# Altium PCB LiPoBattery_charger_PCB.PcbDoc
Units mil, origin at the board's own origin, x right, y up, seen from the top; angles counter-clockwise.
Board outline 2200 x 1700 mil, 2 copper layers (Top Layer, Bottom Layer); 18 components, 10 nets, 53 pads, 5 vias.
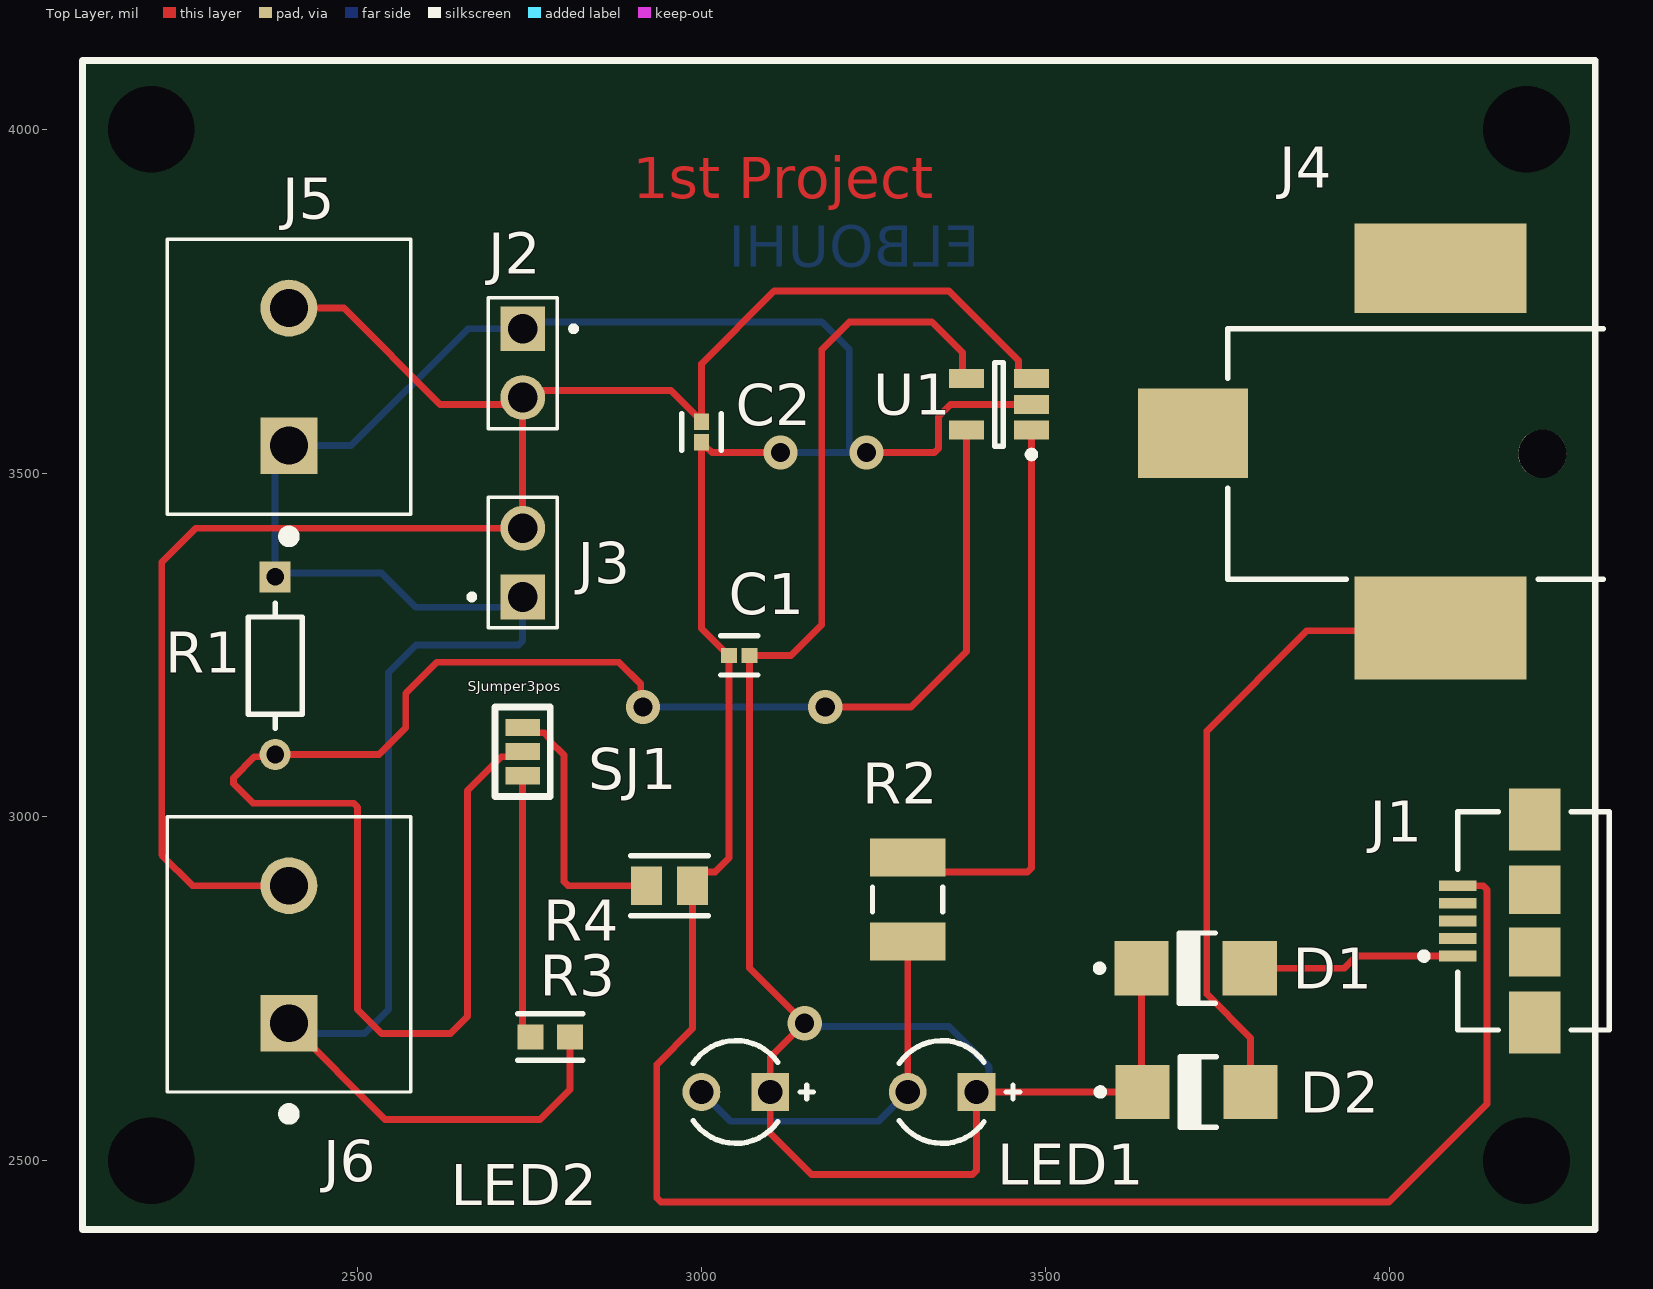
[diagram p0: Top Layer view]
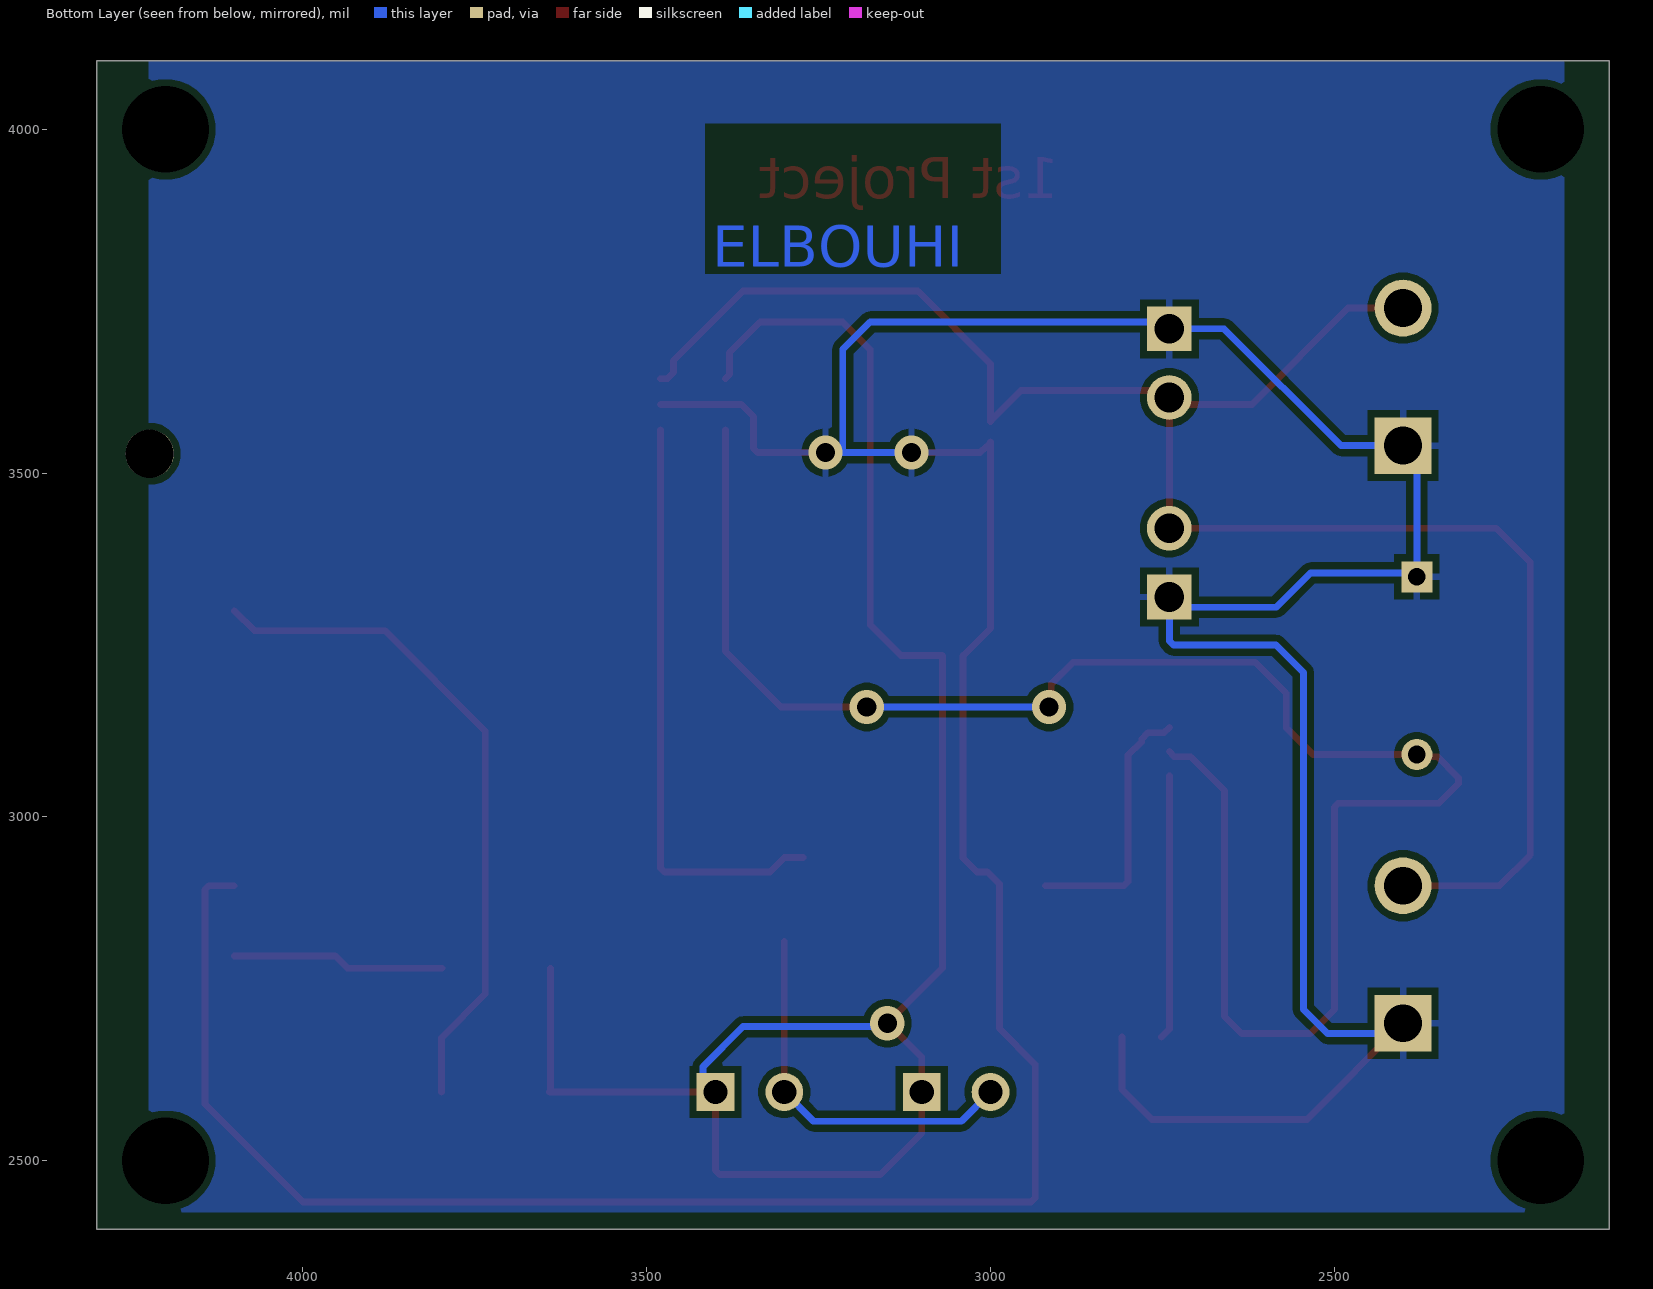
[diagram p1: Bottom Layer view, seen from below]

## Layer stack, top to bottom
Top Solder: solder mask 0.4, Solder Resist, Dk 3.5
Top Layer: signal copper 1.4
Dielectric 1: dielectric 12.6, FR-4, Dk 4.8
Bottom Layer: signal copper 1.4
Bottom Solder: solder mask 0.4, Solder Resist, Dk 3.5

## Board outline
2100,2400 4300,2400 4300,4100 2100,4100

## Design rules (kind name [scope] priority, off if disabled: settings)
Clearance [All] p1: gap=10 ignorepadtopadclearanceinfootprint=FALSE except(0: Arc-Hole Track-Hole SMDPad-Hole THPad-Hole Via-Hole Fill-Hole Poly-Hole Region-Hole Text-Hole)
PolygonConnect [All] p1: connectstyle=Relief reliefconductorwidth=10 reliefentries=4 polygonreliefangle="90 Angle" airgapwidth=10
RoutingVias [All] p1: holewidth=28 width=50 viastyle="Through Hole" minholewidth=28 minwidth=50 maxholewidth=28 maxwidth=50
SolderMaskExpansion [All] p1: expansion=4 istentingtop=FALSE
Width [All] p1: maxlimit=10 minlimit=10 preferedwidth=10
30 further rules are at their usual default settings.

## Components (designator, comment, footprint, x,y, rotation, side; value= is the part's Value field where it differs from the comment)
C1 "4.7uF" FP-GRM155-0_15-IPC_C 3055,3235 r180 top
C2 "4.7uF" FP-GRM155-0_15-IPC_C 3000,3560 r270 top
D1 "DIODE" ONSC-SMA-2-403D-02_V 3718.74,2780 r0 top
D2 "DIODE" ONSC-SMA-2-403D-02_V 3720,2600 r0 top
J1 "MICRO-USB PORT" FCI-10104110-0001LF_V 4156.1,2848.82 r90 top locked
J2 "67997-402HLF" AMPHENOL_67997-402HLF 2740,3660 r180 top
J3 "67997-402HLF" AMPHENOL_67997-402HLF 2740,3370 r0 top
J4 "POWER SUPPLY" FP-RASM722PTR13X-MFG 4055.71,3528.15 r90 top locked
J5 "282841-2" TE_282841-2 2400,3640 r90 top locked
J6 "282841-2" TE_282841-2 2400,2800 r90 top locked
LED1 "RED" INDPR60-254-520X380X650 3350,2600 r180 top
LED2 "RED" INDPR60-254-520X380X650 3050,2600 r180 top
R1 "PROG" FP-CF18-MFG 2380,3220 r270 top value=10kΩ
R2 "330" RESC3225X60X45ML20T20 3300,2880 r90 top
R3 "2K" FP-CR0603-IPC_B 2780,2680 r180 top
R4 "10K" FP-TFCR0805-IPC_B 2953.51,2900 r180 top
SJ1 "SJumper3pos" PCBComponent_1 2740,3095 r90 top
U1 "Charge management controller" SOT-23-OT5_M 3432.76,3600 r180 top

## Footprints (in the part's own frame and the unit in brackets; to place one, negate y for a bottom-side part, rotate by r counter-clockwise, add the part's x,y. Pads: shape width x height; smd on the part's side, far side on the other; paste and mask are expansions set on the pad)
AMPHENOL_67997-402HLF [mm]
  rect 1.65x1.65 / inner round 1.65 / far side rect 1.65x1.65 hole 1.1: 1(0,-1.27)
  round 1.65 hole 1.1: 2(0,1.27)
  silkscreen extent -1.98,-2.41 1.27,2.41
FCI-10104110-0001LF_V [mm] "SMD, 5-Leads, Body 8.06x5.6mm, Pitch 0.65mm"
  rect 0.4x1.4 smd: 1(-1.3,1.425) 2(-0.65,1.425) 3(0,1.425) 4(0.65,1.425) 5(1.3,1.425)
  rect 1.8x1.9 smd: 6(-1.15,-1.425) 7(1.15,-1.425)
  rect 2.3x1.9 smd: 8(-3.75,-1.425) 9(3.75,-1.425)
  silkscreen extent -4.03,-4.17 4.03,2.8, body extent -4.03,-4.17 4.03,1.43, height 2.95
FP-CF18-MFG [mm]
  rect 1.15x1.15 hole 0.65 paste-1000 mask+0: 1(-3.28,0)
  round 1.15 hole 0.65 paste-1000 mask+0: 2(3.28,0)
  silkscreen extent -2.3,-1 2.31,1, body extent -3.96,-1.1 3.96,1.1, height 0.25
FP-CR0603-IPC_B [mil]
  rect 37.72x35.91 smd paste+0 mask+0: 1(-28.62,0) 2(28.62,0)
  silkscreen extent -47,-34 47,34, body extent -57,-28 57,28, height 10
FP-GRM155-0_15-IPC_C [mil]
  rect 23.78x21.98 smd paste+0 mask+0: 1(-14.85,0) 2(14.84,0)
  silkscreen extent -27,-29 27,29, body extent -31,-17 31,17, height 10
FP-RASM722PTR13X-MFG [mm]
  rect 3.3x4.06 smd paste+0 mask+0: 1(0.76,8.65)
  rect 3.81x6.35 smd paste+0 mask+0: 2(-6.43,-0.49)
  rect 3.3x6.35 smd paste+0 mask+0: 3(6.86,-0.49)
  round 1.78 hole 1.78 unplated paste-1000 mask+0: ""(0,-4.25)
  silkscreen extent -4.63,-6.5 4.63,7.38, body extent -8.43,-7.48 8.61,10.78, height 0.25
FP-TFCR0805-IPC_B [mil]
  rect 45.5x55.44 smd paste+0 mask+0: 1(-33.51,0) 2(33.51,0)
  silkscreen extent -56,-43 56,43, body extent -66,-38 66,38, height 10
INDPR60-254-520X380X650 [mm] "THD, 2-Leads, Dia 3.8mm, Pitch 2.54mm"
  rect 1.4x1.4 hole 0.9: 1(-1.27,0)
  round 1.4 hole 0.9: 2(1.27,0)
  silkscreen extent -2.87,-1.9 1.58,1.9, body extent -1.9,-1.9 1.9,1.9, height 6.5
ONSC-SMA-2-403D-02_V [mm] "Molded, 2-Leads, Body 4.57x2.92mm"
  rect 2x2 smd: 1(-2,0) 2(2,0)
  silkscreen extent -3.67,-1.3 0.74,1.3, body extent -2.16,-1.3 2.16,1.3, height 2.2
PCBComponent_1 [mil]
  rect 25x50 smd: 1(-35,0) 2(0,0) 3(35,0)
  silkscreen extent -65,-40 65,40
RESC3225X60X45ML20T20 [mm] "Chip Resistor, 2-Leads, Body 3.20x2.50mm, IPC Low Density"
  rect 1.4x2.8 smd: 1(-1.55,0) 2(1.55,0)
  silkscreen extent -0.45,-1.3 0.45,1.3, body extent -1.7,-1.35 1.7,1.35, height 0.6
SOT-23-OT5_M [mm] "SOT23, 5-Leads, Body 2.9x1.7mm, Pitch 0.95mm, Lead Span 2.8mm, IPC Low Density"
  rect 1.3x0.7 smd: 1(-1.2,0.95) 2(-1.2,0) 3(-1.2,-0.95) 4(1.2,-0.95) 5(1.2,0.95)
  silkscreen extent -1.33,-1.55 0.15,1.97, body extent -0.9,-1.55 0.9,1.55, height 1.45
TE_282841-2 [mm]
  rect 2.1x2.1 / inner round 2.1 / far side rect 2.1x2.1 hole 1.4: 1(-2.54,0)
  round 2.1 hole 1.4: 2(2.54,0)
  silkscreen extent -6.09,-4.5 5.08,4.5, body extent -5.08,0 5.58,9, height 15.2

## Part data
C1 C2: library part CMP-06035-015349-1, "Chip Multilayer Ceramic Capacitors for General Purpose, 0402, 4.7uF, X6S, 22%, 20%, 6.3V", Dielectric=X6S, Tolerance=20%, Voltage Rating (DC)=6.3V, Capacitance=4.7uF, Length=1mm, Thickness=500um, Width=500um
D1 D2: library part CMP-1055-00320-1, "Schottky Power Rectifier, 2-Pin SMA, Pb-Free, Tape and Reel", Manufacturer="On Semiconductor", PartNumber=MBRA140T3G, ComponentLink1Description="Manufacturer URL", ComponentLink1URL=http://www.onsemi.com/, ComponentLink2Description=Datasheet, ComponentLink2URL=http://www.onsemi.cn/pub_link/Collateral/MBRA140T3-D.PDF, ComponentLink3Description="Package Specification", ComponentLink3URL=http://www.onsemi.com/pub_link/Collateral/403D-02.PDF, Configuration=Single, DatasheetVersion="Rev. 10", IFSM Max (A)=30, Mounting Technology="Surface Mount", PackageDescription="2-Pin Small Molded Package, J-Bend Lead, Body 2.605 x 4.315 mm", PackageReference=SMA-2-403D-02, PackageVersion="Rev. G, 07/2012", Packing="Tape and Reel", RoHS=TRUE
J1: library part CMP-2000-05823-1, "Micro USB, Receptacle, -55 to 85 degC, 5-Pin SMD, RoHS, Tape and Reel", Manufacturer="FCI Electronics", Package Description="5-Pin Surface Mount Device, Body 8.06 x 5.6 mm, Pitch 0.65 mm", Package Reference=10104110-0001LF, Connector Mounting=PCB, Connector Type=USBMicroB, Contact Plating=Gold, Contact Termination=SurfaceMountRightAngle, Datasheet URL=http://portal.fciconnect.com/Comergent//fci/drawing/10104110.pdf, Datasheet Version="Rev. C, 03/2011", Gender=Receptacle, Manufacturer URL=http://portal.fciconnect.com/, Mounting Technology=SurfaceMount, No. of Contacts=5
J2 J3: Package=None, Availability=Unavailable, MF="{'manufacturer': u'Amphenol ICC (FCI)'}", MP=67997-402HLF, Price=None
J4: library part CMP-47995-000002-1, "CONN PWR JACK 2.1X5.5MM SOLDER", Case/Package=SMD/SMT, Color=Black, Current Rating=5A, Package Quantity=120, Connector Type=Jack, Contact Material="Copper Alloy", Contact Plating=Tin, Gender=Male, Housing Color=Black, Housing Material=Thermoplastic, Mount="Surface Mount", Shielding=Unshielded, Termination=Solder
J5 J6: "Conn Terminal Block 2 POS 5.08mm Solder ST Thru-Hole 17.5A/Contact", Package=None, Availability="In Stock", Check_prices=https://www.snapeda.com/parts/282841-2/TE+Connectivity+AMP+Connectors/view-part/?ref=eda, EU_RoHS_Compliance="Compliant with Exemptions", MF="TE Connectivity", MP=282841-2, Price=None, Purchase-URL=https://pricing.snapeda.com/search/part/282841-2/?ref=eda, SnapEDA_Link=https://www.snapeda.com/parts/282841-2/TE+Connectivity+AMP+Connectors/view-part/?ref=snap
LED1 LED2: library part CMP-1674-00005-1, "Radial LED, 12.6 mcd, 20 mA, 2 V, -55 to 100 degC, 2-Pin THD, RoHS, Bulk", Case\Package=Radial, Current Rating="3.6 A", Max Operating Temperature="130 degC", Min Operating Temperature="-40 degC", Package Quantity=55, Resistance="0.045 Ohm", Tolerance=20%, ComponentLink1Description="Manufacturer URL", ComponentLink1URL=http://www.us.liteon.com/, ComponentLink2Description=Datasheet, ComponentLink2URL=https://datasheet.ciiva.com/15117/getdatasheetpartid-187746-15117985.pdf, DatasheetVersion=Dec-03, Height="1.1 inch", Lead Pitch="11.44 mm", Length="0.97 inch", Mount="Through Hole", PackageDescription="2-Pin Through Hole Device, Dia 3.8 mm, Pitch 2.54 mm", PackageReference=LTL-1CHE, Packaging=Tray, Radiation Hardening=No, RoHSCompliant=true, Shielding=Unshielded, Width="0.62 inch"
R1: library part CMP-26528-000002-1, "RES 10K OHM 1/8W 5% CF AXIAL", Manufacturer="Stackpole Electronics", Manufacturer Part Number=CF18JT10K0, Package=CF18, Power Rating=0.125W, Resistance=10kΩ, Temperature="-55°C to +155°C", Temperature Coefficient=0-500ppm/°C, Temperature Range High=+155°C, Temperature Range Low=-55°C, Tolerance=5%, Voltage Rating=250V, Automotive=No, Category=Res, ComponentLink2Description=Datasheet, ComponentLink2URL=http://www.seielect.com/Catalog/SEI-CF_CFM.pdf, Composition="Carbon Film", Device Class L1="Passive Components", Device Class L2=Resistors, Device Class L3="Through-Hole Resistors", Digikey Description="RES 10K OHM 1/8W 5% CF AXIAL", Height=2mm, Ipc Land Pattern Name=RESAD656W65L360D200, Lead Free=Yes, Octopart=https://octopart.com/cf18jt10k0-stackpole+electronics-19205642, RoHS=TRUE, Series=CF
R2: library part CMP-2005-00707-1, Manufacturer="Vishay Dale", Part Number=CRCW1210330RJNTA
R3: library part CMP-07231-005094-1, "Thick Film Chip Resistors 0603 2kΩ 0.1W 5% 200ppm/°C", Case Code (Imperial)=0603, Case Code (Metric)=1608, Max Operating Temperature=155°C, Max Power Dissipation=100mW, Min Operating Temperature=-55°C, Package Quantity=10000, Resistance=2kR, Temperature Coefficient=200ppm/°C, Tolerance=5%, Voltage Rating=50V, Case/Package=0603, Composition="Thick Film", Depth=0.8mm, Features="Moisture Resistant", Height=0.022inch, Length=0.063inch, Military Standard=Not, Mount="Surface Mount", Number of Terminations=2, Packaging="Tape and Reel", Power Rating=100mW, Termination=SMD/SMT, Thickness=457um, Width=0.031inch
R4: library part CMP-250906-173936-1, "RES Thin Film,  10kΩ, 0.1%, 0.1W, 50ppm/°C, 0805"
SJ1: library part Solder_jumper_3pos, "solder jumper 3 pins"
U1: library part CMP-0133-00141-1, "Simple, Miniature Single-Cell, Fully Integrated Li-Ion/Li-Polymer Charge Management Controller, 4.2V, 5-Pin SOT-23, Industrial Temperature, Tape and Reel", Code_IPC=SOT23-5, DatasheetVersion="revB, Sep-2007", PackageDescription="5-Lead Plastic Small Outline Transistor (OT) [SOT-23]", PackageReference=SOT-23-OT5, PackageVersion="revBB, Aug-2009"

## Free pads (board coordinates)
  round 60 hole 126: 3(2200,2500) 3(2200,4000) 3(4200,2500) 3(4200,4000)

## Via types
v1: diameter 50, hole 28, Top Layer to Bottom Layer, 5 vias

## Nets (pads, with @x,y where several pads share a name; then routed paths per layer and width w, separated by ;. In a path a pad name is that pad's centre, name@x,y a point inside that pad or via, vN(x,y) a via of type N, cw(c..) or ccw(c..) an arc to the next point about the centre after c; other vN are vias at no path point)
GND: C1.2 C2.2 J1.5 J2.1 J3.1 J5.1 J6.1 R1.1 R3.1 R4.1 U1.2 | length 6476.4
  Top Layer w10: J6.1 2540,2560 2765,2560 2808.62,2603.62 R3.1 ; C2.2 C2.2@3000,3544.26 ; v1(3115,3530) 3015.16,3530 3006.89,3538.27 3005.99,3538.27 C2.2@3000,3544.26 ; v1(3240,3530) 3339.06,3530 3344.92,3535.86 3344.92,3582.59 3362.33,3600 U1.2 ; J1.5 4136.7,2900 4142.56,2894.14 4142.56,2582.56 4000,2440 2940.86,2440 2935,2445.86 2935,2640.13 2987.03,2692.15 R4.1 2987.03,2902.25 3004.78,2920 3020,2920 3040.16,2940.16 C1.2 3039.26,3235 3000,3274.26 C2.2@3000,3544.26
  Bottom Layer w10: J6.1 2415,2685 2510,2685 2545,2720 2545,3210 2585,3250 2734.14,3250 2740,3255.86 J3.1 2725,3305 2584.55,3305 2534.55,3355 2385.87,3355 R1.1 2380,3520 J5.1 2490.24,3540 2660.24,3710 J2.1 2750,3720 3175,3720 3215,3680 v1@3215,3530 ; v1(3115,3530) v1@3215,3530 ; v1(3240,3530) v1@3215,3530
NetC1_1: C1.1 D1.1 D2.1 LED1.1 LED2.1 U1.4 | length 2754.8
  Top Layer w10: U1.4 3379.65,3643.26 3379.65,3675.35 3335,3720 3215,3720 3175,3680 3175,3280 3130,3235 C1.1 3069.85,2780.15 v1(3150,2700) 3100,2650 3100,2540 3160,2480 3394.14,2480 3400,2485.86 LED1.1 D2.1 3640,2601.26 D1.1
  Bottom Layer w10: v1(3150,2700) 3155,2695 3360,2695 3418.3,2636.7 3418.3,2618.3 LED1.1
NetC2_1: C2.1 J2.2 J3.2 J5.2 J6.2 U1.3 | length 2720.6
  Top Layer w10: J6.2 2260,2900 2215,2945 2215,3370 2265,3420 J3.2 J2.2 ; J5.2 2480,3740 2620,3600 2730,3600 J2.2 ; J6.2@2428.22,2908.55 J6.2@2428.55,2908.55 ; C2.1 C2.1@3000,3575.75 ; U1.3 3469.94,3637.4 3461.16,3646.18 3461.16,3663.84 3360,3765 3105.86,3765 3000,3659.14 C2.1@3000,3575.75 ; J2.2 2750,3620 2955.75,3620 C2.1@3000,3575.75
NetD1_2: D1.2 J1.1 | length 309.8
  Top Layer w10: D1.2 3935,2780 3952.64,2797.64 J1.1
NetD2_2: D2.2 J4.2 | length 988.9
  Top Layer w10: D2.2 3798.74,2678.79 3735,2742.53 3735,3125 3880.86,3270.86 4070.86,3270.86 J4.2@4100,3300
NetLED1_2: LED1.2 LED2.2 R2.1 | length 554.2
  Top Layer w10: LED1.2 R2.1
  Bottom Layer w10: LED2.2 3042.56,2557.44 3257.44,2557.44 LED1.2
NetR1_2: R1.2 SJ1.2 U1.5 | length 2679.7
  Top Layer w10: SJ1.2 2732.5,3087.5 2708.79,3087.5 2660,3038.71 2660,2710 2635,2685 2535,2685 2500,2720 2500,3014.14 2494.14,3020 2347.53,3020 2319.14,3048.39 2319.14,3056.68 2350.05,3087.59 2376.72,3087.59 R1.2 2530.87,3090.87 2570,3130 2570,3180 2615,3225 2880,3225 2911.72,3193.28 2911.72,3163.28 v1(2915,3160) ; v1(3180,3160) 3305,3160 3385.51,3240.51 U1.5
  Bottom Layer w10: v1(2915,3160) v1(3180,3160)
NetR2_2: R2.2 U1.1 | length 855.4
  Top Layer w10: R2.2@3272.44,2941.02 R2.2 3321.02,2920 3474.14,2920 3480,2925.86 U1.1
NetR3_2: R3.2 SJ1.1 | length 384.7
  Top Layer w10: SJ1.1 2740,2691.38 R3.2
NetR4_2: R4.2 SJ1.3 | length 385.3
  Top Layer w10: SJ1.3 2747.5,3122.5 2771.21,3122.5 2780,3113.71 2780,3110 2800,3090 2800,2905.86 2805.86,2900 R4.2
pads on no net: J1.2 J1.3 J1.4 J1.6 J1.7 J1.8 J1.9 J4. J4.1 J4.3

## Polygon pours and split planes (outlines as drawn)
GND on Bottom Layer "GND_L02_P000" (solid, pour order 0): 4224.5,4100 4224.5,2435 4214.79,2425.29 2165.77,2425.29 2165.77,4098.73 2164.5,4100

## Other copper
Top Layer:
  text "1st Project" at 2900,3900 h60
Bottom Layer:
  text "ELBOUHI" at 3404.94,3800 h60

## Silkscreen, mask and mechanical layers (free items; w line width, h text height)
Top Overlay:
  lines w10: 2100,2400 4300,2400 4300,2900 4300,4100 2100,4100 2100,2400

## Text inside footprints (layer, text, board x,y; h text height)
J1: Mechanical 6 "PCB EDGE" at 4276.1,2528.82 h11.81 r90